# Altium PCB rpi.PcbDoc
Units mil, origin at the board's own origin, x right, y up, seen from the top; angles counter-clockwise.
Board outline 3090 x 1975 mil, 2 copper layers (Top Layer, Bottom Layer); 5 components, 15 nets, 65 pads, 2 vias.
Unrouted connection lines stored in the file: 1.
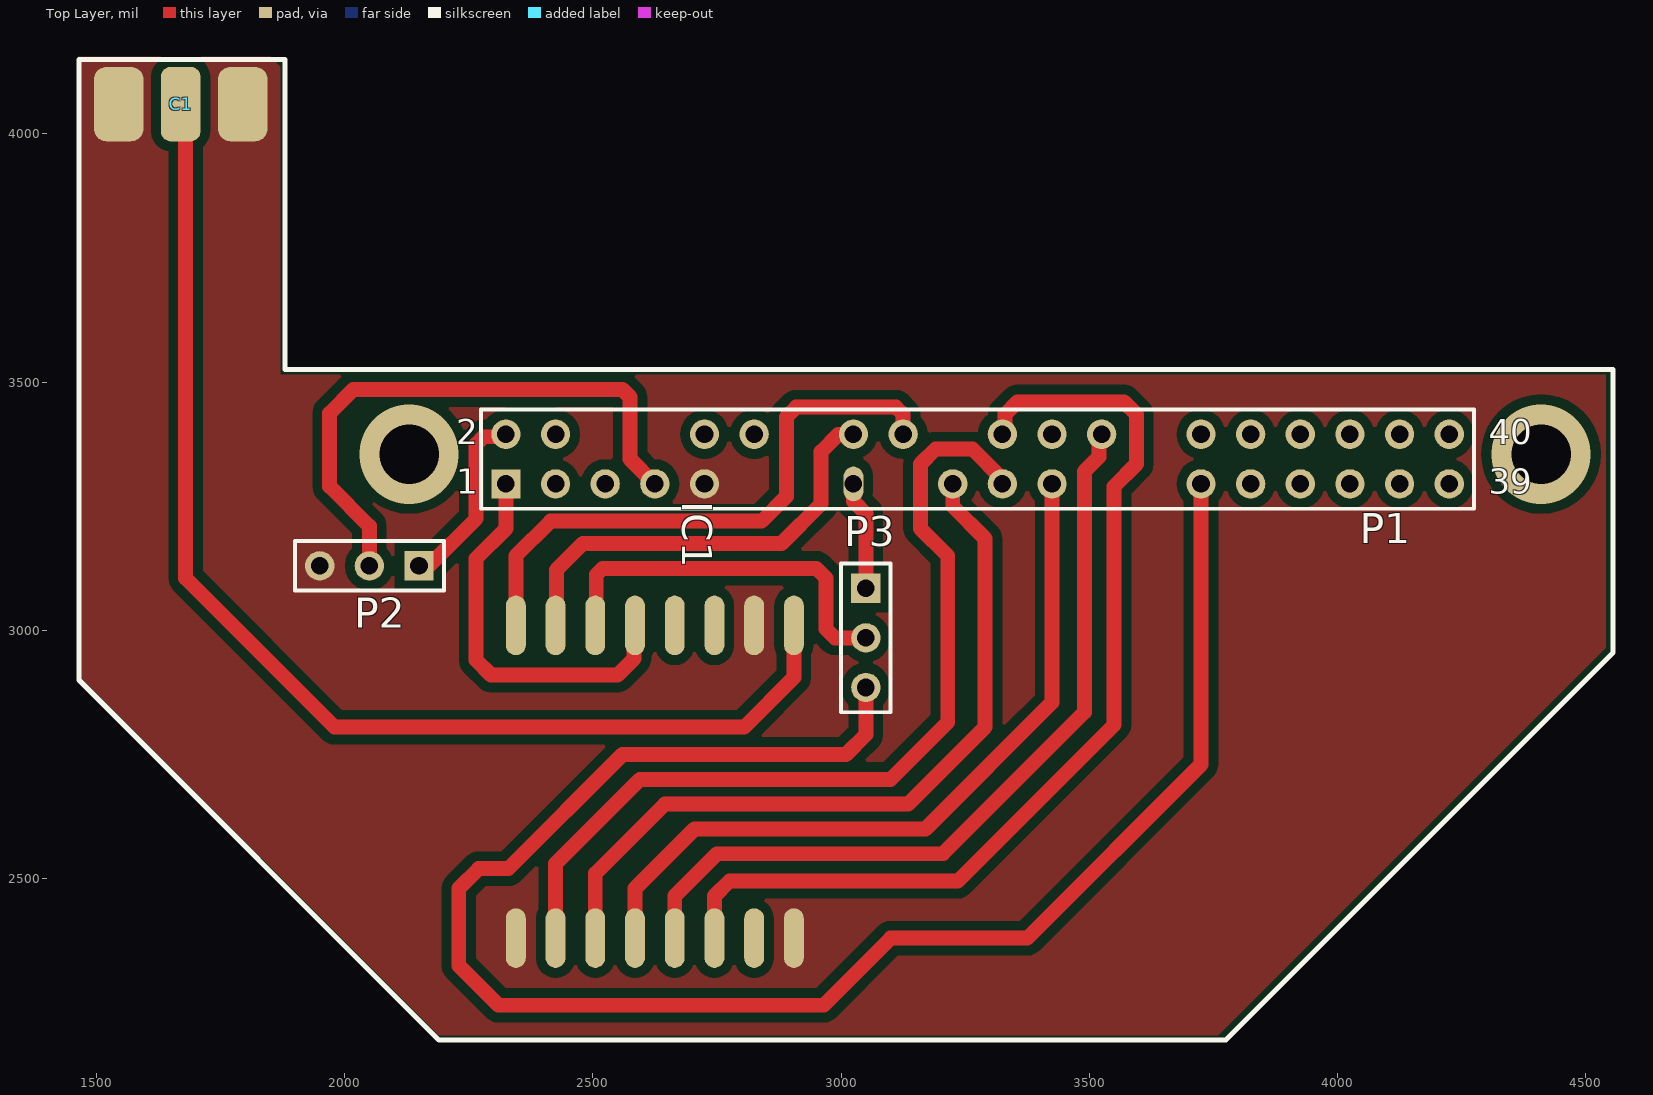
[diagram p0: Top Layer view]
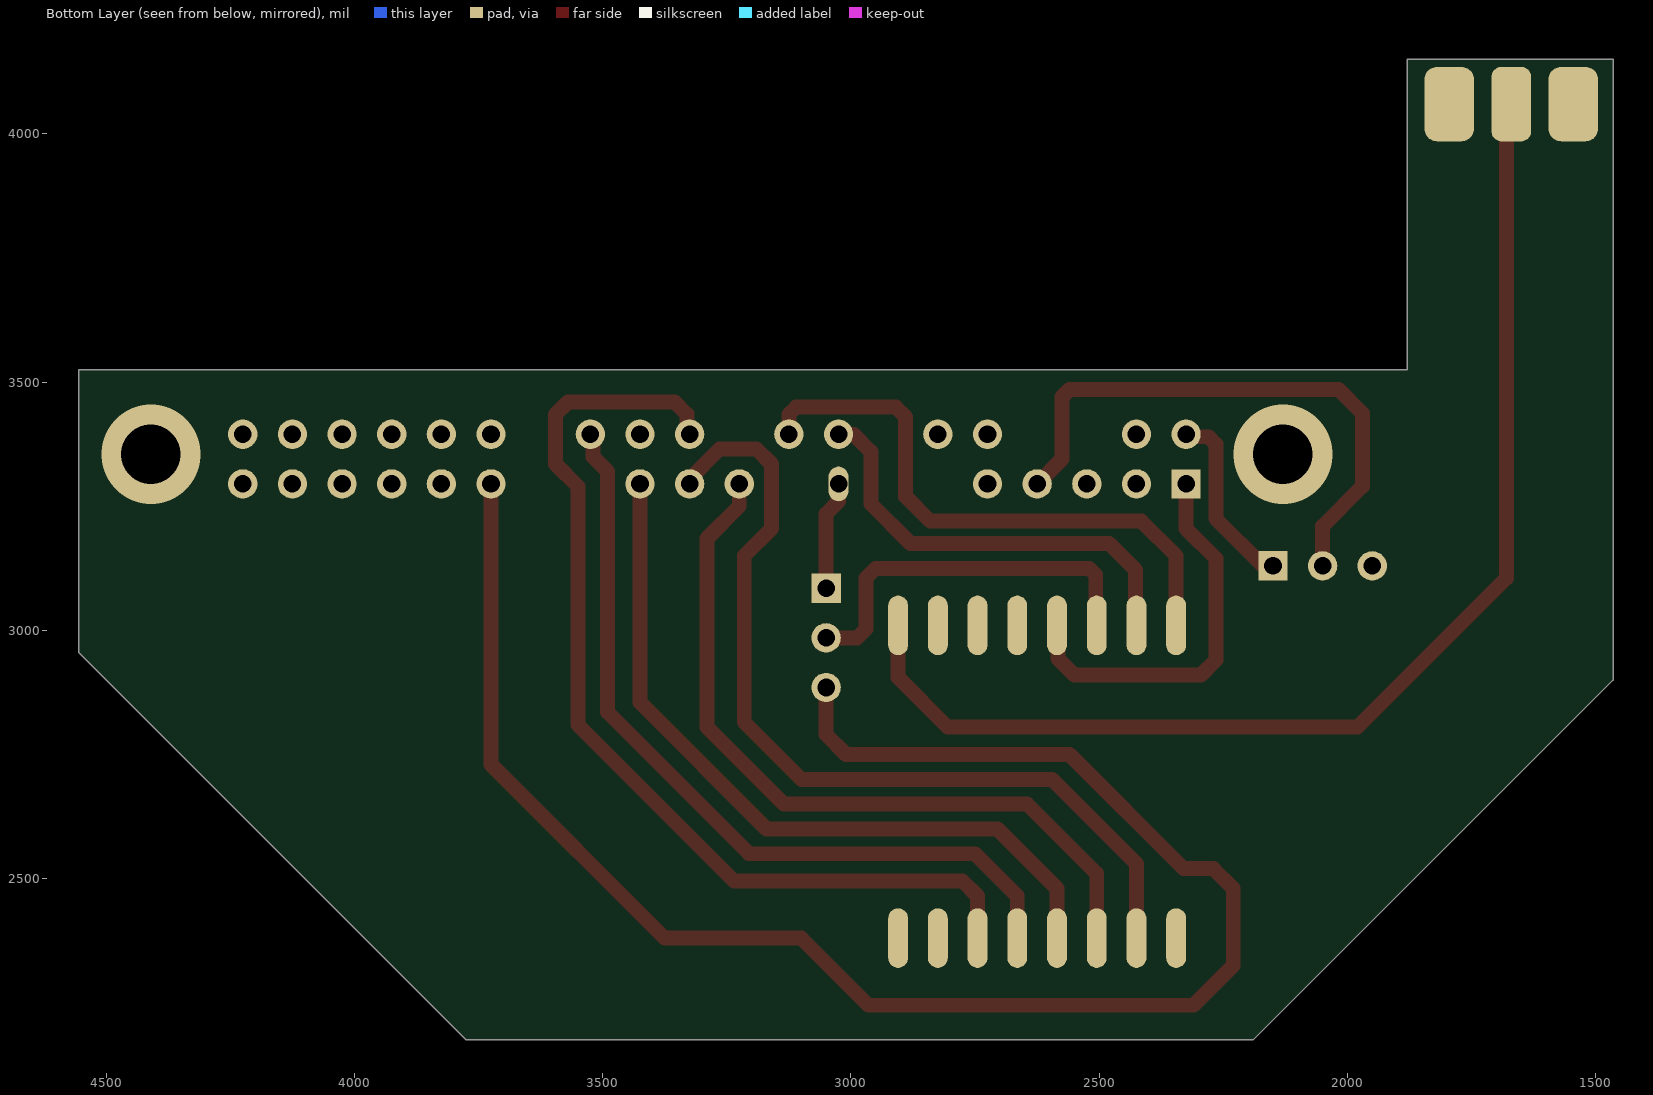
[diagram p1: Bottom Layer view, seen from below]

## Layer stack, top to bottom
Top Solder: solder mask 0.4, Solder Resist, Dk 3.5
Top Layer: signal copper 1.4
Dielectric 1: dielectric 12.6, FR-4, Dk 4.8
Bottom Layer: signal copper 1.4
Bottom Solder: solder mask 0.4, Solder Resist, Dk 3.5

## Board outline
1465,2900 1465,4150 1880,4150 1880,3525 4555,3525 4555,2955 3775,2175 2190,2175

## Design rules (kind name [scope] priority, off if disabled: settings)
Clearance Clearance_6 [InNamedPolygon('Top Layer-No Net 1')] p1: gap=20 ignorepadtopadclearanceinfootprint=FALSE
Clearance Clearance_5 [InNamedPolygon('Top Layer-GND')] p2: gap=10 ignorepadtopadclearanceinfootprint=FALSE except(0: Arc-Hole Track-Hole SMDPad-Hole THPad-Hole Via-Hole Fill-Hole Poly-Hole Region-Hole Text-Hole)
Clearance Clearance_4 [InNamedPolygon('Top Layer-GND')] p3: gap=20 ignorepadtopadclearanceinfootprint=TRUE
Clearance Clearance_3 [InNamedPolygon('Top Layer-GND')] p4: gap=10 ignorepadtopadclearanceinfootprint=FALSE except(0: Arc-Hole Track-Hole SMDPad-Hole THPad-Hole Via-Hole Fill-Hole Poly-Hole Region-Hole Text-Hole)
Clearance Clearance_2 [InNamedPolygon('Top Layer-GND')] p5: gap=20 ignorepadtopadclearanceinfootprint=FALSE
Clearance Clearance_1 [All] p6: gap=10 ignorepadtopadclearanceinfootprint=FALSE except(0: Arc-Hole Track-Hole SMDPad-Hole THPad-Hole Via-Hole Fill-Hole Poly-Hole Region-Hole Text-Hole)
Clearance [InNet('GND')] p7: gap=20 ignorepadtopadclearanceinfootprint=FALSE
PolygonConnect [All] p1: connectstyle=Direct reliefconductorwidth=10 reliefentries=4 polygonreliefangle="90 Angle" airgapwidth=10
RoutingVias [All] p1: holewidth=28 width=50 viastyle="Through Hole" minholewidth=28 minwidth=50 maxholewidth=28 maxwidth=50
SolderMaskExpansion [All] p1: expansion=4
Width [All] p1: maxlimit=30 minlimit=30 preferedwidth=30
30 further rules are at their usual default settings.

## Components (designator, comment, footprint, x,y, rotation, side; value= is the part's Value field where it differs from the comment)
C1 "SMA" SMA 1770,4060 r90 top
IC1 "RFM95W" RFM95W 2905,2380 r90 top
P1 "Header 20X2" HDR2X20 2325,3295 r0 top
P2 "Header 3" HDR1X3 2150,3130 r180 top
P3 "Header 3" HDR1X3 3050,3085 r270 top

## Footprints (in the part's own frame and the unit in brackets; to place one, negate y for a bottom-side part, rotate by r counter-clockwise, add the part's x,y. Pads: shape width x height; smd on the part's side, far side on the other; paste and mask are expansions set on the pad)
HDR1X3 [mm] "Connector; Header; 3 Position"
  rect 1.5x1.5 hole 0.9: 1(0,0)
  round 1.5 hole 0.9: 2(2.54,0) 3(5.08,0)
  silkscreen extent -1.27,-1.27 6.35,1.27
HDR2X20 [mm] "Connector; Header; 20x2 Position"
  rect 1.5x1.5 hole 0.9: 1(0,0)
  round 1.5 hole 0.9: 2(0,2.54) 3(2.54,0) 4(2.54,2.54) 5(5.08,0) 7(7.62,0) 9(10.16,0) 10(10.16,2.54) 12(12.7,2.54) 16(17.78,2.54) 18(20.32,2.54) 19(22.86,0) 21(25.4,0) 22(25.4,2.54) 23(27.94,0) 24(27.94,2.54) 26(30.48,2.54) 29(35.56,0) 30(35.56,2.54) 31(38.1,0) 32(38.1,2.54) 33(40.64,0) 34(40.64,2.54) 35(43.18,0) 36(43.18,2.54) 37(45.72,0) 38(45.72,2.54) 39(48.26,0) 40(48.26,2.54)
  round 0 all layers, no hole: 6(5.08,2.54) 11(12.7,0) 13(15.24,0) 14(15.24,2.54) 17(20.32,0) 20(22.86,2.54) 25(30.48,0) 27(33.02,0) 28(33.02,2.54)
  rect 0x0 all layers, no hole: 8(7.62,2.54)
  oval 1.016x1.778 hole 0.9: 15(17.78,0)
  silkscreen extent -1.27,-1.27 49.53,3.81
RFM95W [mil]
  oval 120x40 all layers, no hole: 1(0,0) 2(0,80) 3(0,160) 4(0,240) 5(0,320) 6(0,400) 7(0,480) 8(0,560) 9(630,560) 10(630,480) 11(630,400) 12(630,320) 13(630,240) 14(630,160) 15(630,80) 16(630,0)
  body extent -10,-40 620,590, height 80
SMA [mil]
  rrect50% 150x100 all layers, no hole: 1(0,-25) 3(0,225)
  rrect50% 150x80 all layers, no hole: 2(0,100)
  body extent -57,-100 2484,297, height 197

## Part data
P1: "Header, 20-Pin, Dual row", LatestRevisionDate=17-Jul-2002, LatestRevisionNote="Re-released for DXP Platform.", Publisher="Altium Limited"
P2 P3: "Header, 3-Pin", LatestRevisionDate=17-Jul-2002, LatestRevisionNote="Re-released for DXP Platform.", Publisher="Altium Limited"

## Via types
v1: diameter 200, hole 120, Top Layer to Bottom Layer, 2 vias

## Nets (pads, with @x,y where several pads share a name; then routed paths per layer and width w, separated by ;. In a path a pad name is that pad's centre, name@x,y a point inside that pad or via, vN(x,y) a via of type N, cw(c..) or ccw(c..) an arc to the next point about the centre after c; other vN are vias at no path point)
3V3: IC1.12 P1.1 | length 791.8
  Top Layer w30: P1.1 2325,3205 2265,3145 2265,2940 2295,2910 2550,2910 2583.09,2943.09 2583.09,3008.09 IC1.12
5V: P1.2 P2.1 | length 372.6
  Top Layer w30: P2.1 2170,3130 2265,3225 2265,3375 2280,3390 2320,3390 P1.2
ANT: C1.2 IC1.16 | length 2440.7
  Top Layer w30: C1.2@1680,4050 1680,3105 1980,2805 2805,2805 2905,2905 IC1.16
DIO0: P1.15 P3.1 | length 220.4
  Top Layer w30: P1.15 3025,3260 3050,3235 P3.1
DIO0_0: IC1.11 P3.2 | length 769.2
  Top Layer w30: IC1.11 2506.91,3011.91 2506.91,3111.91 2520,3125 2950,3125 2970,3105 2970,3002.57 2987.57,2985 P3.2
DIO0_1: P1.29 P3.3 | length 3492.4
  Top Layer w30: P3.3 3050,2790 3010,2750 2560,2750 2330,2520 2270,2520 2230,2480 2230,2325 2310,2245 2965,2245 3100,2380 3375,2380 3725,2730 P1.29
DIO1: IC1.10 P1.16 | length 840.4
  Top Layer w30: IC1.10 IC1.10@2426.91,3011.91 ; IC1.10@2426.91,3056.91 2426.91,3121.91 2480,3175 2880,3175 2960,3255 2960,3360 2995,3395 P1.16
DIO2: IC1.9 P1.18 | length 1138.8
  Top Layer w30: IC1.9@2345,3055 2345,3150 2415,3220 2840,3220 2890,3270 2890,3430 2909.53,3449.53 3110.47,3449.53 3125,3435 P1.18
GND: C1.1 C1.3 IC1.1 IC1.8 IC1.15 P1.9 P1.20 P2.3
GPIO4: P1.7 P2.2 | length 1167.2
  Top Layer w30: P2.2 2050,3210 1970,3290 1970,3437.43 2017.57,3485 2560,3485 2575,3470 2575,3345 P1.7
MISO: IC1.7 P1.21 | length 1813.1
  Top Layer w30: IC1.7 2425,2530 2595,2700 3100,2700 3215,2815 3215,3150 3160,3205 3160,3335 3190,3365 3265,3365 3325,3305 P1.21
MOSI: IC1.6 P1.19 | length 1554.1
  Top Layer w30: IC1.6 2505,2510 2645,2650 3135,2650 3290,2805 3290,3185 3225,3250 P1.19
NSS: IC1.4 P1.26 | length 1637.8
  Top Layer w30: IC1.4 2665,2465 2750,2550 3205,2550 3490,2835 3490,3320 3519.44,3349.44 3519.44,3389.44 P1.26
RST: IC1.3 P1.22 | length 2004.3
  Top Layer w30: IC1.3 2745,2465 2775,2495 3235,2495 3550,2810 3550,3290 3595,3335 3595,3435 3570,3460 3355,3460 3330.56,3435.56 3330.56,3400.56 P1.22
SCK: IC1.5 P1.23 | length 1535.3
  Top Layer w30: IC1.5 2585,2480 2705,2600 3170,2600 3425,2855 P1.23
pads on no net: IC1.2 IC1.13 IC1.14 P1.3 P1.4 P1.5 P1.6 P1.8 P1.10 P1.11 P1.12 P1.13 P1.14 P1.17 P1.24 P1.25 P1.27 P1.28 P1.30 P1.31 P1.32 P1.33 P1.34 P1.35 P1.36 P1.37 P1.38 P1.39 P1.40
copper on no net:
  other v1: 2130,3355 4410,3355

## Polygon pours and split planes (outlines as drawn)
GND on Top Layer "Top Layer-No Net 1" (solid, pour order 6): 3760,2185 4540,2965 4540,3515 1870,3515 1870,4135 1850,4155 1465,4155 1465,2910 2190,2185

## Silkscreen, mask and mechanical layers (free items; w line width, h text height)
Top Overlay:
  lines w10: 1465,2900 1465,3560 1465,4060 1465,4150 1880,4150 1880,3525 4555,3525 4555,2955 3775,2175 2545,2175 2190,2175 1465,2900

## Text inside footprints (layer, text, board x,y; h text height)
P1: Top Overlay "1" at 2225,3275 h50; Top Overlay "2" at 2225,3375 h50; Top Overlay "40" at 4305,3375 h50; Top Overlay "39" at 4305,3275 h50